# Altium PCB ROS2_0.PcbDoc
Units mil, origin at the board's own origin, x right, y up, seen from the top; angles counter-clockwise.
Board outline 3930 x 2315 mil, 2 copper layers (Top Layer, Bottom Layer); 52 components, 58 nets, 249 pads, 82 vias.
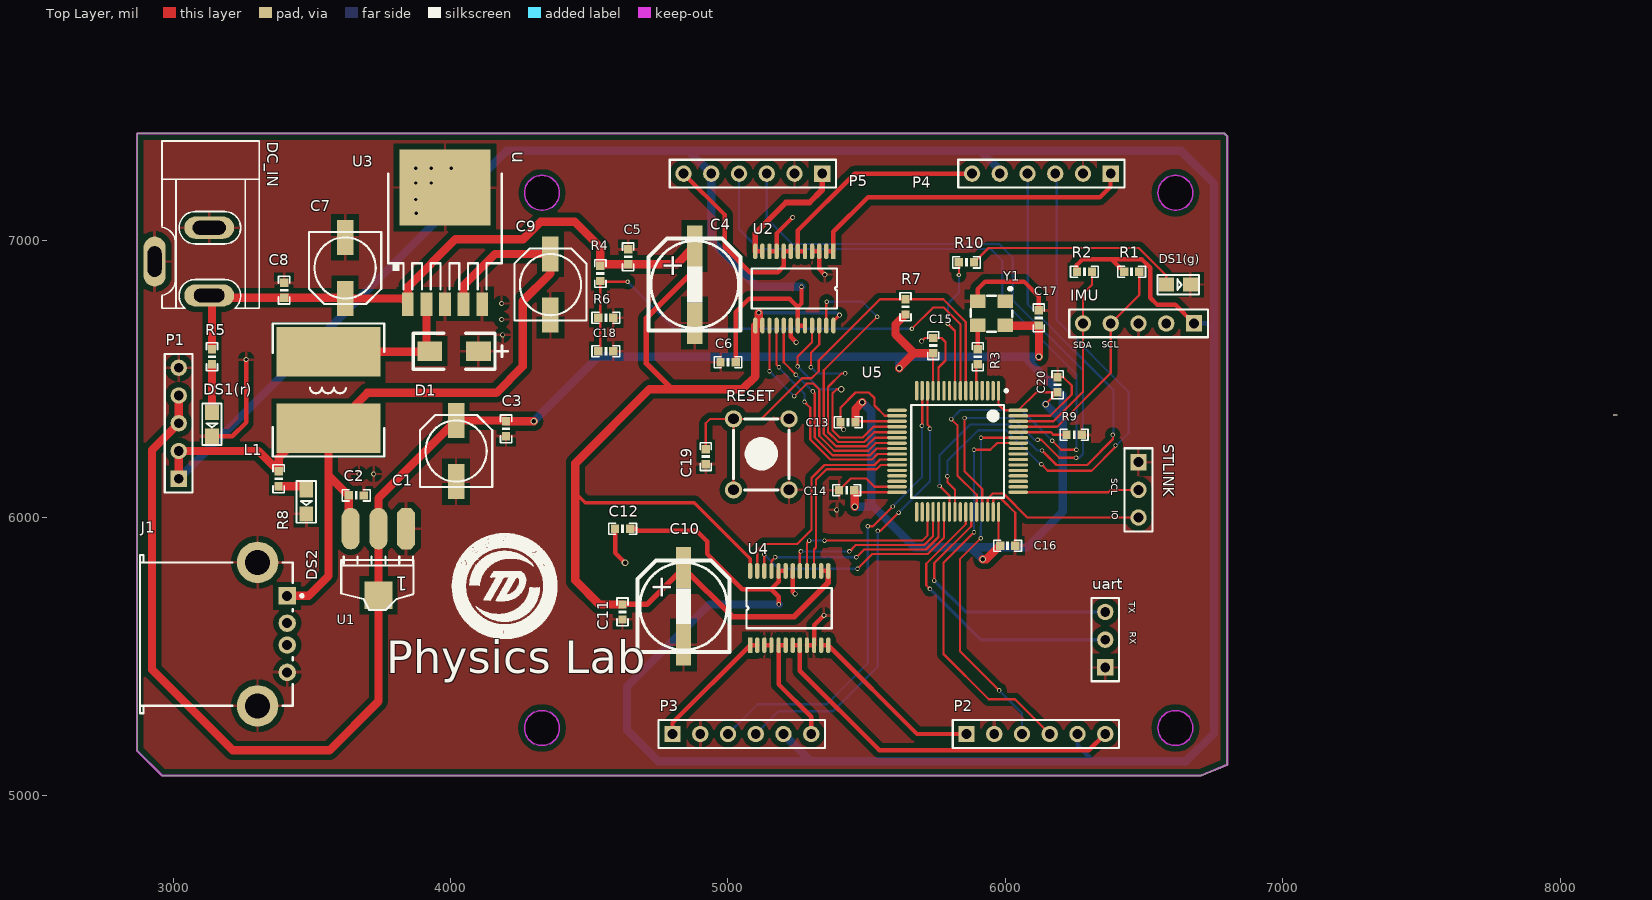
[diagram p0: Top Layer view]
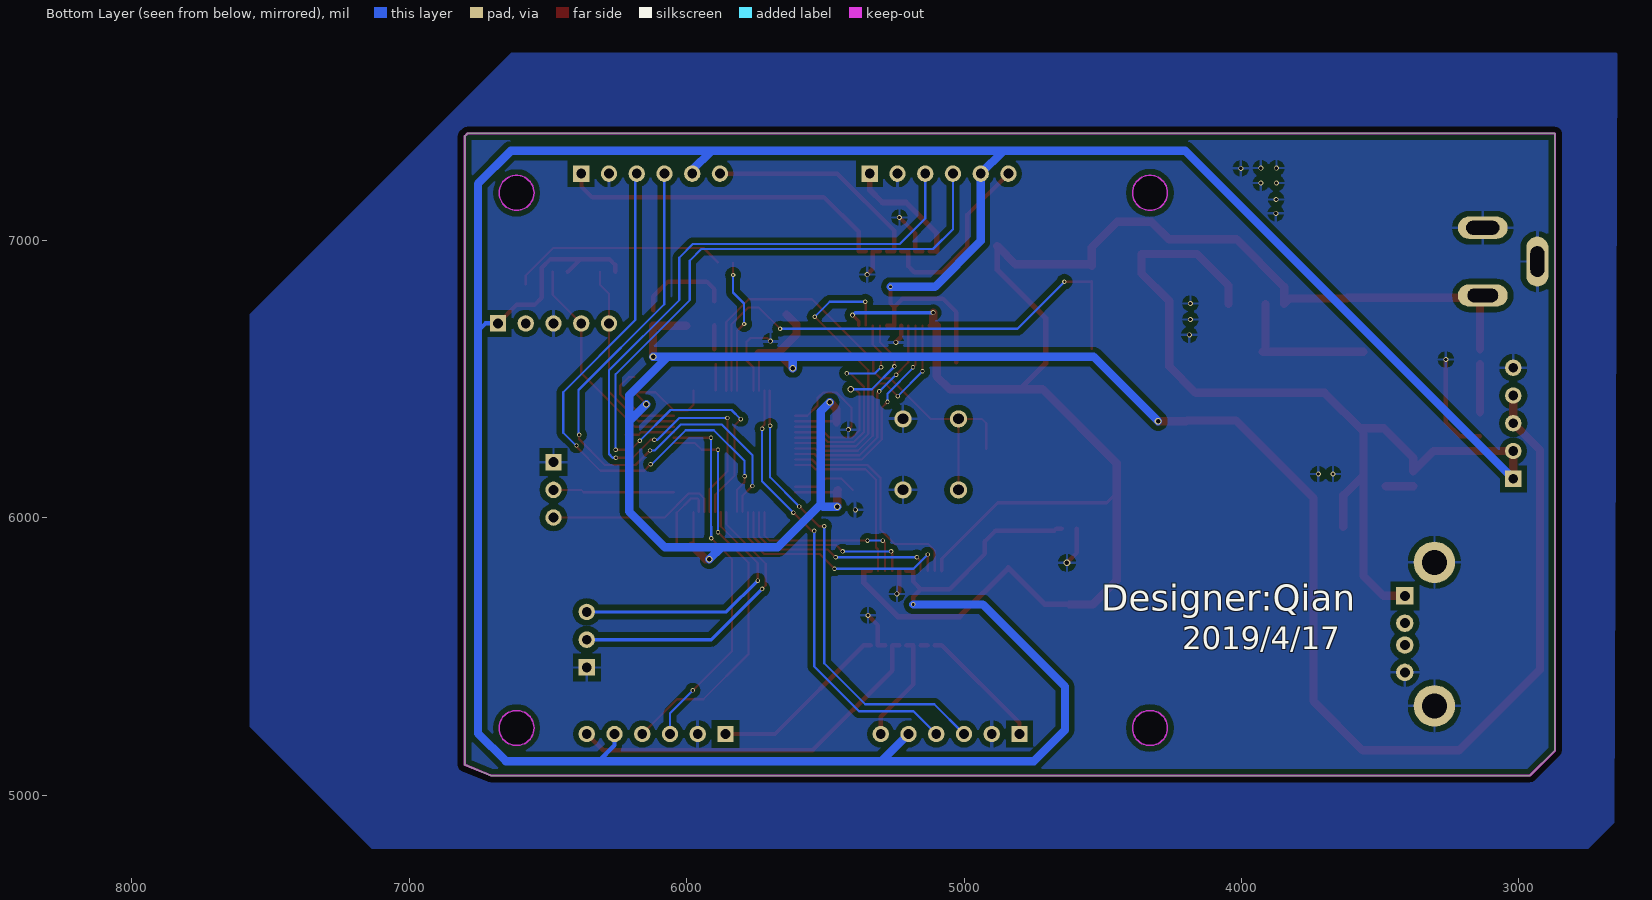
[diagram p1: Bottom Layer view, seen from below]

## Layer stack, top to bottom
Top Layer: signal copper 1.4
Dielectric: dielectric 12.6, FR-4, Dk 4.8
Bottom Layer: signal copper 1.4

## Board outline
2960,5070 2870,5160 2870,7385 6790,7385 6800,7375 6800,5109.14 6705.5,5070
cut-out: 6550.16,5241.58 ccw(c6613.15,5241.58) 6613.15,5178.59 ccw(c6613.15,5241.58) 6676.14,5241.58 ccw(c6613.15,5241.58) 6613.15,5304.57 ccw(c6613.15,5241.58)
cut-out: 6613.15,7107.72 cw(c6613.15,7170.71) 6550.16,7170.71 cw(c6613.15,7170.71) 6613.15,7233.71 cw(c6613.15,7170.71) 6676.14,7170.71 cw(c6613.15,7170.71)
cut-out: 4329.69,7107.72 cw(c4329.69,7170.71) 4266.69,7170.71 cw(c4329.69,7170.71) 4329.69,7233.71 cw(c4329.69,7170.71) 4392.68,7170.71 cw(c4329.69,7170.71)
cut-out: 4329.69,5178.59 cw(c4329.69,5241.58) 4266.69,5241.58 cw(c4329.69,5241.58) 4329.69,5304.57 cw(c4329.69,5241.58) 4392.68,5241.58 cw(c4329.69,5241.58)

## Design rules (kind name [scope] priority, off if disabled: settings)
Clearance 铺铜 [InPolygon] p1: gap=20
Clearance 32 [InComponent(U5) vs InComponent(U5)] p2: gap=0
Clearance [All] p3: gap=8
MinimumSolderMaskSliver [All] p1: minsoldermaskwidth=5
PolygonConnect [All] p1: connectstyle=Relief reliefconductorwidth=10 reliefentries=4 polygonreliefangle="90 Angle"
RoutingVias [All] p1: holewidth=28 width=50 viastyle="Through Hole" minholewidth=8 minwidth=16 maxholewidth=28 maxwidth=50
SilkscreenOverComponentPads [All] p1: minsilkscreentomaskgap=0
SolderMaskExpansion [All] p1: expansion=4
TestPointUsage [All] p1: valid=0 allowmultiple=FALSE
Testpoint [All] p1: side=15 testpointundercomponent=TRUE minsize=40 maxsize=100 preferedsize=60 minholesize=0 maxholesize=40 preferedholesize=32 testpointgrid=1 style=1023 order=0-112345678
Width [All] p1: maxlimit=30 minlimit=8 preferedwidth=10
22 further rules are at their usual default settings.

## Components (designator, comment, footprint, x,y, rotation, side; value= is the part's Value field where it differs from the comment)
C1 "220uF" CC6.56.5 4020,6240 r270 top
C2 "104" 0603P 3660,6080 r180 top
C3 "104" 0603P 4200,6320 r90 top
C4 "680UF" SMD-EC-F8 4880,6840 r270 top
C5 "104" 0603P 4640,6940 r90 top
C6 "104" 0603P 5000,6560 r0 top
C7 "220uF" CC6.56.5 3620,6900 r90 top
C8 "104" 0603P 3400,6820 r270 top
C9 "220uF" CC6.56.5 4360,6840 r270 top
C10 "680UF" SMD-EC-F8 4840,5680 r270 top
C11 "104" 0603P 4620,5660 r270 top
C12 "104" 0603P 4620,5960 r0 top
C13 "104" 0603P 5433,6344 r180 top
C14 "104" 0603P 5428,6099 r180 top
C15 "104" 0603P 5740,6620 r90 top
C16 "104" 0603P 6008,5899 r0 top
C17 "104" 0603P 6120,6720 r270 top
C18 "104" 0603P 4560,6600 r180 top
C19 "104" 0603P 4920,6220 r270 top
C20 "104" 0603P 6188,6479 r90 top
D1 "1N5822" SS54 4100,6600 r180 top
DC_IN "POWER" DC10B 2960,7220 r270 top
DS1(g) "LED1" SMDLED 6580,6840 r0 top
DS1(r) "LED1" SMDLED 3140,6380 r270 top
DS2 "LED1" SMDLED 3480,6100 r270 top
IMU "IMU" HDR1X5 6680,6700 r180 top (schematic designator P6)
J1 "787761-1" 787761 2880,5580 r180 top
L1 "LC" CD104 3560,6460 r270 top
P1 "Header 5" HDR1X5 3020,6140 r90 top
P2 "moter1" HDR1X6 5860,5220 r0 top
P3 "moter2" HDR1X6 4800,5220 r0 top
P4 "moter3" HDR1X6 6380,7240 r180 top
P5 "moter4" HDR1X6 5340,7240 r180 top
R1 "4.7K" 0603P 6455,6886 r0 top
R2 "4.7K" 0603P 6285,6886 r0 top
R3 "22R" 0603P 5900,6580 r90 top
R4 "10K" 0603P 4540,6880 r90 top
R5 "10K" 0603P 3140,6580 r90 top
R6 "1K" 0603P 4560,6720 r180 top
R7 "10K" 0603P 5640,6760 r270 top
R8 "10K" 0603P 3380,6140 r90 top
R9 "10K" 0603P 6248,6299 r180 top
R10 "10K" 0603P 5860,6920 r180 top
RESET "KEY_M" KEY_M 5020,6100 r90 top
STLINK "ST-LINK" HDR1X3 6480,6200 r270 top (schematic designator P7)
U1 "AMS1117-3.3" AMS1117 3840,5960 r180 top
U2 "tb6612" tb6612 5380,6960 r270 top
U3 "LM2596SX-ADJ/NOP" KTT0005B 3980,6980 r270 top
U4 "tb6612" tb6612 5080,5540 r90 top
U5 "STM32F101RCT6" STM-LQFP64_N 5828,6239 r270 top
uart "Header 3" HDR1X3 6360,5460 r90 top
Y1 "5032 8M" 5032 6000,6780 r180 top

## Footprints (in the part's own frame and the unit in brackets; to place one, negate y for a bottom-side part, rotate by r counter-clockwise, add the part's x,y. Pads: shape width x height; smd on the part's side, far side on the other; paste and mask are expansions set on the pad)
0603P [mil]
  rect 30x30 smd: 1(-27,0) 2(27.5,-0.06)
  silkscreen extent -50,-20 50,20
5032 [mm]
  rect 1.4x1.2 smd: 1(0,0) 2(0,2.2) 3(2.54,0) 4(2.54,2.2)
  silkscreen extent -0.64,-1.14 3.17,2.79
787761 [mm] "Connector; USB1.1, Type A, Thru-Hole; 4 Position; Right Angle"
  rect 1.6x1.6 hole 0.92: 1(-13.49,-3.5)
  round 1.6 hole 0.92: 2(-13.49,-1) 3(-13.49,1) 4(-13.49,3.5)
  round 3.8 hole 2.3: 5(-10.78,6.57) 6(-10.78,-6.57)
  silkscreen extent -14.97,-7.25 0,7.25
AMS1117 [mil]
  oct 65x150 smd: 1(0.03,-0.06)
  oval 65x150 smd: 2(100.03,-0.06) 3(200.03,-0.06)
  rect 100x100 smd: 4(100.03,239.94)
  silkscreen extent -26,100 234,293
CC6.56.5 [mm]
  rect 3.2x1.5 smd: 1(-2.794,0) 2(2.8,0)
  silkscreen extent -3.3,-3.3 3.3,3.3
CD104 [mm]
  rect 4.5x9.5 smd: 1(-3.5,0) 2(3.5,0)
  silkscreen extent -6.1,-5.1 6.1,5.1, body extent -4.5,-4.92 4.5,4.92, height 5.3
DC10B [mil]
  oval 80x180 hole 50 slot 110 at 90 deg: 1(419.09,170)
  oval 80x180 hole 50 slot 120 at 90 deg: 2(175,170)
  oval 180x80 hole 50 slot 110 at 0 deg: 3(297.05,-26.85)
  silkscreen extent -138,0 465,350
HDR1X3 [mm] "Connector; Header; 3 Position"
  rect 1.5x1.5 hole 0.9: 1(0,0)
  round 1.5 hole 0.9: 2(2.54,0) 3(5.08,0)
  silkscreen extent -1.27,-1.27 6.35,1.27
HDR1X5 [mm] "Connector; Header; 5 Position"
  rect 1.5x1.5 hole 0.9: 1(0,0)
  round 1.5 hole 0.9: 2(2.54,0) 3(5.08,0) 4(7.62,0) 5(10.16,0)
  silkscreen extent -1.27,-1.27 11.43,1.27
HDR1X6 [mm] "Connector; Header; 6 Position"
  rect 1.5x1.5 hole 0.9: 1(0,0)
  round 1.5 hole 0.9: 2(2.54,0) 3(5.08,0) 4(7.62,0) 5(10.16,0) 6(12.7,0)
  silkscreen extent -1.27,-1.27 13.97,1.27
KEY_M [mil]
  round 62 hole 38: 1(0,0) 1(255.91,0) 2(0,-200) 2(255.91,-200)
  silkscreen extent 0,-200 255,0
KTT0005B [mm]
  rect 2.16x1.07 smd paste-0.102 mask+0.051: 1(5.338,-3.4) 2(5.338,-1.7) 3(5.338,0.005) 4(5.338,1.7) 5(5.338,3.4)
  rect 6.99x8.33 smd paste-0.102 mask+0.051: 6(-5.338,0)
  silkscreen extent -6.6,-5.2 4,5.2, body extent 0,0 0.25,0.25, height 0.25
SMD-EC-F8 [mm]
  rect 3.8x1.4 smd: 1(-3.525,0) 2(3.525,0)
  silkscreen extent -4.21,-4.22 4.19,4.2
SMDLED [mm]
  rect 1.4x1.27 smd: 1(0.001,-0.002) 2(2.211,-0.002)
  silkscreen extent -0.8,-0.89 3.01,0.89
SS54 [mil] "SS54"
  rect 90x70 smd: 1(0,0) 2(175,0)
  silkscreen extent -105,-65 235,65
STM-LQFP64_N [mm] "Thin QFP, 64-Leads, Body 10x10mm, Pitch 0.5mm, IPC Medium Density"
  oval 1.8x0.3 smd: 1(-5.55,3.75) 2(-5.55,3.25) 3(-5.55,2.75) 4(-5.55,2.25) 5(-5.55,1.75) 6(-5.55,1.25) 7(-5.55,0.75) 8(-5.55,0.25) 9(-5.55,-0.25) 10(-5.55,-0.75) 11(-5.55,-1.25) 12(-5.55,-1.75) 13(-5.55,-2.25) 14(-5.55,-2.75) 15(-5.55,-3.25) 16(-5.55,-3.75) 33(5.55,-3.75) 34(5.55,-3.25) 35(5.55,-2.75) 36(5.55,-2.25) 37(5.55,-1.75) 38(5.55,-1.25) 39(5.55,-0.75) 40(5.55,-0.25) 41(5.55,0.25) 42(5.55,0.75) 43(5.55,1.25) 44(5.55,1.75) 45(5.55,2.25) 46(5.55,2.75) 47(5.55,3.25) 48(5.55,3.75)
  oval 0.3x1.8 smd: 17(-3.75,-5.55) 18(-3.25,-5.55) 19(-2.75,-5.55) 20(-2.25,-5.55) 21(-1.75,-5.55) 22(-1.25,-5.55) 23(-0.75,-5.55) 24(-0.25,-5.55) 25(0.25,-5.55) 26(0.75,-5.55) 27(1.25,-5.55) 28(1.75,-5.55) 29(2.25,-5.55) 30(2.75,-5.55) 31(3.25,-5.55) 32(3.75,-5.55) 49(3.75,5.55) 50(3.25,5.55) 51(2.75,5.55) 52(2.25,5.55) 53(1.75,5.55) 54(1.25,5.55) 55(0.75,5.55) 56(0.25,5.55) 57(-0.25,5.55) 58(-0.75,5.55) 59(-1.25,5.55) 60(-1.75,5.55) 61(-2.25,5.55) 62(-2.75,5.55) 63(-3.25,5.55) 64(-3.75,5.55)
  silkscreen extent -5.67,-4.25 4.25,4.58, body extent -5,-5 5,5, height 1.6
tb6612 [mm]
  rect 1.45x0.4 smd: 1(0,0)
  oval 1.45x0.4 smd: 2(0,-0.65) 3(0,-1.3) 4(0,-1.95) 5(0,-2.6) 6(0,-3.25) 7(0,-3.9) 8(0,-4.55) 9(0,-5.2) 10(0,-5.85) 11(0,-6.5) 12(0,-7.15) 13(6.8,-7.15) 14(6.8,-6.5) 15(6.8,-5.85) 16(6.8,-5.2) 17(6.8,-4.55) 18(6.8,-3.9) 19(6.8,-3.25) 20(6.8,-2.6) 21(6.8,-1.95) 22(6.8,-1.3) 23(6.8,-0.65) 24(6.8,0)
  silkscreen extent 1.56,-7.48 5.24,0.33

## Part data
C1 C7 C9: library part CAP
C2 C3 C5 C6 C8 C11 C12 C13 C14 C15 C16 C17 C18 C19 C20: library part C
C4 C10: library part CAP, "贴片铝电解电容 50V 680UF  10*10.2mm"
D1: library part "Diode 1N4007", "1 Amp General Purpose Rectifier"
DC_IN: library part POW
DS1(g) DS1(r) DS2: library part LED2, "Typical RED, GREEN, YELLOW, AMBER GaAs LED"
IMU: library part "Header 5", "Header, 5-Pin"
J1: "USB 1.1, Right Angle, Thru-Hole, A Type, Receptacle, 4 Position, Black"
L1: "电感"
P1: "Header, 5-Pin"
P2 P3 P4 P5: library part "Header 6", "Header, 6-Pin"
R1 R2 R3 R4 R5 R6 R7 R8 R9 R10: library part R
STLINK: library part "Header 3", "Header, 3-Pin"
U1: library part AMS1117
U3: "Imported"
U5: "ARM Cortex-M3 32-bit MCU, 256 KB Flash, 32 KB Internal RAM, 51 I/Os, 64-pin LQFP, -40 to 85 degC, Tray"
uart: "Header, 3-Pin"
Y1: library part 0532

## Via types
v1: diameter 16, hole 10, Top Layer to Bottom Layer, 46 vias
v2: diameter 18, hole 12, Top Layer to Bottom Layer, 23 vias
v3: diameter 24, hole 16, Top Layer to Bottom Layer, 9 vias
v4: diameter 16, hole 8, Top Layer to Bottom Layer, 4 vias

## Nets (pads, with @x,y where several pads share a name; then routed paths per layer and width w, separated by ;. In a path a pad name is that pad's centre, name@x,y a point inside that pad or via, vN(x,y) a via of type N, cw(c..) or ccw(c..) an arc to the next point about the centre after c; other vN are vias at no path point)
5V: C2.2 C6.2 C9.1 C12.2 IMU.1 J1.1 L1.2 P1.1 P1.2 P2.5 P3.5 P4.5 P5.5 R1.1 R2.1 R8.2 U1.3 U2.19 U2.20 U3.4 U4.19 U4.20 | length 15917.7
  Top Layer w16: C12.2 4667.63,5959.94 4675.56,5952 4887,5952 4925,5914 4925,5869 5052,5742 5156,5742 ; C6.2 5027.5,6740.5 5076,6789 5222,6789 5252.05,6758.95 ; v1(5183,5687) 5183,5715 5156,5742 ; U4.19 U4.20 5182.36,5768.36 5156,5742 ; v1(5265,6832) 5265,6771.91 5252.05,6758.95 ; U2.20 U2.19 5252.05,6758.95 ; R2.1 6258,6911 6279,6932 6382,6932 ; R1.1 6382,6932 ; IMU.1 6612,6768 6547,6768 6522,6793 6522,6901 6491,6932 6382,6932
  Top Layer w30: P1.1 P1.2 3307.56,6240 R8.2 3380.06,6215.06 3487.2,6322.2 L1.2 ; J1.1 3487.8,5717.8 3560,5790 3560,6152.56 ; U1.3@3632.5,5967.53 C2.2 3560,6152.56 ; U3.4 4046.93,6836.93 4160,6950 C9.1 4360,6880 4260,6780 4260,6545 4165,6450 3700,6450 3560,6310 3560,6152.56
  Bottom Layer w16: P2.5 6260,5179 6317,5122 ; IMU.1 6725,6700 6752,6673
  Bottom Layer w30: P1.1 4202,7322 4858,7322 ; v1(5183,5687) 4932,5687 4636,5391 4636,5234 4748,5122 5298,5122 ; P3.5 5298,5122 ; v1(5265,6832) 5105,6832 4940,6997 P5.5 4858,7322 ; P4.5 5980,7253 5911,7322 ; 4858,7322 5911,7322 ; 5298,5122 6317,5122 6652,5122 6752,5222 6752,6673 6752,7204 6634,7322 5911,7322
12V: C4.1 C5.1 C7.1 C8.2 C10.1 C11.1 DC_IN.1 R4.2 R5.2 U2.13 U2.14 U2.24 U3.1 U4.13 U4.14 U4.24 | length 6616.5
  Top Layer w12: 4450,6089 4485,6054 4878,6054 5080,5852 U4.24 ; U2.24 5380,6708 v2(5402,6730)
  Top Layer w16: U2.13 U2.14 ; U4.14 U4.13
  Top Layer w20: C11.1 4708.2,5687 C10.1 5015.8,5643 5239,5643 5361.5,5765.5 U4.13 ; 4799,6463 4705,6557 4705,6718 4880,6893 C4.1
  Top Layer w30: DC_IN.1 3140.06,6790.84 R5.2 ; DC_IN.1@3138.41,6792.5 C8.2 C7.1@3617.5,6792.5 ; C7.1 3826,6790 U3.1 3846.14,6832.14 4018,7004 4262,7004 4324,7066 4448,7066 4540.06,6973.94 R4.2 4545.56,6913 C5.1 4814.2,6913 C4.1 ; C11.1 4536,5687 4450,5773 4450,6089 4450,6196 4717,6463 4799,6463 5052,6463 5098.5,6509.5 U2.13 ; 5111,6704.78 v2(5111,6739)
  Bottom Layer w12: v2(5111,6739) 5393,6739 v2(5402,6730)
A8: U5.41
A15: U5.50
AIN1: U2.21 U5.20 | length 789.3
  Top Layer w8: v1(5251,6545) 5251,6580 5303.23,6632.23 U2.21 ; v3(5408,6463) 5392,6463 5377,6448 5377,6315 5403,6289 5485.71,6289 5524.29,6327.58 U5.20
  Bottom Layer w8: v1(5251,6545) 5333,6463 v3(5408,6463)
AIN2: U2.22 U5.21 | length 818.3
  Top Layer w8: v1(5299,6542) 5299,6594 5328.82,6623.82 U2.22 ; v1(5423,6520) 5410,6520 5361,6471 5361,6308.37 5396.37,6273 5492.33,6273 5527.23,6307.9 U5.21
  Bottom Layer w8: v1(5299,6542) 5321,6520 v1(5423,6520)
AO1: P4.1 U2.1 U2.2 | length 1201.1
  Top Layer w16: U2.2 U2.1 5380,7030 5505,7155 6341,7155 6379,7193 P4.1@6379,7232
AO2: P4.6 U2.5 U2.6 | length 813.5
  Top Layer w16: U2.5 U2.6 5252.05,7035.05 5457,7240 P4.6
B3: U5.55
B4: U5.56
B5: U5.57
BIN1: U2.17 U5.24 | length 782.9
  Top Layer w8: U2.17 5200.87,6560.13 v1@5245.5,6515.5 ; v1(5306,6455) 5313,6448 5313,6288.49 5376.49,6225 5512.22,6225 5536.06,6248.84 U5.24
  Bottom Layer w8: v1@5245.5,6515.5 v1(5306,6455)
  other v1: 5245,6515
BIN2: U2.16 U5.25 | length 812.5
  Top Layer w8: U2.16 5175.28,6550.72 v1(5184,6542) ; v1(5276,6417) 5297,6396 5297,6281.86 5369.86,6209 5518.84,6209 5539,6229.16 U5.25
  Bottom Layer w8: v1(5184,6542) 5183.23,6541.23 5183.23,6539.77 5276,6447 v1(5276,6417)
BO1: P5.1 U2.11 U2.12 | length 455.4
  Top Layer w16: U2.12 U2.11
  Top Layer w20: U2.12 5098.5,7025.5 5209,7136 5294,7136 5340,7182 P5.1
BO2: P5.6 U2.7 U2.8 | length 663.6
  Top Layer w16: P5.6 4989,7091 4989,6975 5079,6885 5179,6885 5200.87,6906.87 U2.8 U2.7
BOOT0: R9.2 U5.60 | length 177.7
  Top Layer w8: U5.60 6164.17,6307.9 6173,6299.06 R9.2
BOOT1: U5.28
C10: U5.51
C11: U5.52
C12: U5.53
CIN1: U4.21 U5.37 | length 764.5
  Top Layer w8: U4.21 5156.77,5843.77 v1(5170,5857) ; v1(5463,5857) 5491,5885 5713.99,5885 5759.1,5930.12 U5.37
  Bottom Layer w8: v1(5170,5857) v1(5463,5857)
CIN2: U4.22 U5.38 | length 867.6
  Top Layer w8: v1(5131,5867) 5131.18,5866.82 U4.22 ; v1(5467,5816) 5520,5869 5720.61,5869 5778.79,5927.17 U5.38
  Bottom Layer w8: v1(5131,5867) 5182,5816 v1(5467,5816)
CO1: P3.1 U4.1 U4.2 | length 461.6
  Top Layer w16: P3.1 4800,5260 U4.1 U4.2
CO2: P3.6 U4.5 U4.6 | length 394.3
  Top Layer w16: U4.6 U4.5 5182.36,5399.64 5300,5282 P3.6
DIN1: U4.17 U5.36 | length 658.5
  Top Layer w8: U4.17 5259.13,5874.13 v1(5263,5878) ; v1(5438,5878) 5461,5901 5707.36,5901 5739.42,5933.06 U5.36
  Bottom Layer w8: v1(5263,5878) v1(5438,5878)
DIN2: U4.16 U5.35 | length 631.8
  Top Layer w8: U4.16 5284.72,5908.72 v1(5293,5917) ; v1(5348,5917) 5700.73,5917 5719.73,5936 U5.35
  Bottom Layer w8: v1(5293,5917) v1(5348,5917)
DO1: P2.1 U4.11 U4.12 | length 656.6
  Top Layer w16: U4.11 U4.12 5681.5,5220 P2.1
DO2: P2.6 U4.7 U4.8 | length 1361.9
  Top Layer w16: U4.7 U4.8 5259.13,5447.87 5546,5161 6301,5161 P2.6
GND: C1.2 C2.1 C3.1 C4.2 C5.2 C6.1 C7.2 C8.1 C9.2 C10.2 C11.2 C12.1 C13.2 C14.2 C15.2 C16.2 C17.1 C18.1 C19.2 C20.2 D1.1 DC_IN.2 DC_IN.3 DS1(g).2 DS1(r).2 DS2.2 IMU.3 J1.4 J1.5 J1.6 P1.5 P2.2 P3.2 P4.2 P5.2 R6.1 R9.1 RESET.2 STLINK.1 U1.1 U2.3 U2.4 U2.9 U2.10 U2.18 U3.3 U3.5 U3.6 U4.3 U4.4 U4.9 U4.10 U4.18 U5.12 U5.18 U5.31 U5.47 U5.63 uart.1 Y1.3 | length 2942.6
  Top Layer w8: C14.2 5442.44,6141 5498,6141 5527.95,6111.05 U5.31 ; v2(5417,6317) 5405.5,6328.5 C13.2 5405.5,6396.5 5460,6451 5508,6451 5528,6431 5528,6404 5565.05,6366.95 U5.18 ; v2(5698,6636) 5709.5,6647.5 C15.2 5769.5,6647.5 5784,6633 5784,6566 5759.1,6541.1 U5.12 ; U5.47 5955.95,6063.95 5961,6069 5984,6069 6035.5,6017.5 C16.2 ; U5.63 6161.95,6366.95 6239,6444 6239,6476 6208.5,6506.5 C20.2
  Top Layer w16: 3139.94,6292.96 3212.96,6292.96 3263,6343 v2(3263,6570) ; C12.1 4593,5873 v3(4629,5837) ; U4.3 U4.4 ; U2.10 U2.9 5175.28,7024.28 v2(5233,7082) ; U2.18 5226.46,6651.54 v2(5246,6632) ; U4.18 5233.54,5733.46 v2(5242,5725) ; U4.9 U4.10 5310.32,5612.32 v2(5346,5648) ; U2.4 U2.3 5328.82,6896.18 v2(5349,6876) ; Y1.3 5900,6824 5927,6851 6067,6851 6120,6798 C17.1
  other v2: 5392,6028 3670,6157 3723,6157 4188,6659 4184,6714 4184,6772 3876,7097 3875,7147 3874,7206 3930,7206 4002,7259 3874,7260 3930,7260
LED: R10.2 U5.9 | length 489.3
  Top Layer w8: v4(5793,6698) 5818.16,6672.84 U5.9 ; v4(5832.5,6874.5) R10.2
  Bottom Layer w8: v4(5793,6698) 5793,6772 5832.5,6811.5 v4(5832.5,6874.5)
MA1: P2.4 U5.58 | length 1454.1
  Top Layer w8: v1(5887,5947) 5777,5837 5777,5508 5940,5345 6035,5345 P2.4 ; v1(5887,6245) 5946,6245 5969.53,6268.53 U5.58
  Bottom Layer w8: v1(5887,5947) v1(5887,6245)
MA2: P3.4 U5.14 | length 1621.7
  Top Layer w8: v1(5540,5952) 5549,5952 v1(5615,6018) ; U5.14 5719.73,6334.27 5728,6326 v1(5728,6320)
  Bottom Layer w8: P3.4 5182,5302 5379,5302 5540,5463 v1(5540,5952) ; v1(5615,6018) 5728,6131 v1(5728,6320)
MA3: P4.4 U5.39 | length 2068.7
  Top Layer w8: v1(5763,6114) 5798.47,6078.53 U5.39 ; v1(6132,6242) 6184,6190 6295,6190 6388,6283 v1@6388,6291
  Bottom Layer w8: v1(5763,6114) 5763,6226 5873,6336 6021,6336 6115,6242 v1(6132,6242) ; P4.4@6081,7241 6081,6769 6390,6460 v1@6390,6298
  other v1: 6387,6298
MA4: P5.4 U5.44 | length 2884.3
  Top Layer w8: v1(5805,6355) 5827,6333 5827,6152 5896.9,6082.1 U5.44 ; v1(6169,6277) 6201,6245 v1(6256,6245)
  Bottom Layer w8: P5.4 5040,7040 5112,6968 5947,6968 5989,6926 5989,6784 6256,6517 v1(6256,6245) ; v1(5805,6355) 5838,6388 6058,6388 v1(6169,6277)
MB1: P2.3 U5.59 | length 1328.4
  Top Layer w8: v1(5911.43,5925.43) 5836,5850 5836,5519 v1(5978,5377) ; v1(5912.21,6288.21) U5.59
  Bottom Layer w8: v1(5911.43,5925.43) 5911.43,5968 5912.21,5967.21 v1(5912.21,6288.21) ; v1(5978,5377) 6060,5295 P2.3
MB2: P3.3 U5.15 | length 1684.5
  Top Layer w8: v1(5504,5969) 5523,5969 v1(5594,6040) ; v1(5699,6331) 5700.05,6332.05 U5.15
  Bottom Layer w8: P3.3 5107,5327 5356,5327 5504,5475 v1(5504,5969) ; v1(5594,6040) 5699,6145 v1(5699,6331)
MB3: P4.3 U5.40 | length 2034.7
  Top Layer w8: v1(5791,6149) 5791,6128 5818.16,6100.84 U5.40 ; v1(6130,6192) 6153,6169 6311,6169 v1@6397,6255
  Bottom Layer w8: v1(5791,6149) 5791,6204 5902,6315 6003,6315 6126,6192 v1(6130,6192) ; P4.3@6176,7220 6185,7211 6185,6712 6445,6452 6445,6306 v1@6398,6259
  other v1: 6397,6260
MB4: P5.3 U5.45 | length 2776.7
  Top Layer w8: v1(5853,6359) 5853,6167 5916.58,6103.42 U5.45 ; v1(6116,6281) 6129,6281 6194,6216 v1(6255,6216)
  Bottom Layer w8: P5.3 5140,7078 5232,6986 5978,6986 6027,6937 6027,6784 6280,6531 6280,6229 6267,6216 v1(6255,6216) ; v1(5853,6359) 6027,6359 6105,6281 v1(6116,6281)
NetC19_1: C19.1 R7.1 RESET.1 U5.7 | length 1775.6
  Top Layer w8: C19.1 4920,6340 4935.91,6355.91 RESET.1@5020,6355.91 ; RESET.1@5020,6100 RESET.1@5020,6355.91 ; U5.7 5857.53,6705.47 5776,6787 R7.1 5548,6787 5327,6566 5327,6528 5301,6502 5267,6502 5120.91,6355.91 RESET.1@5020,6355.91
NetD1_2: D1.2 L1.1 U3.2 | length 520.7
  Top Layer w30: L1.1 D1.2@3922.8,6597.8 ; D1.2@3913.07,6611.93 U3.2
NetDS1(g)_1: DS1(g).1 R10.1 | length 788.6
  Top Layer w8: R10.1 5939,6972 6481,6972 6580.03,6872.97 6580.03,6839.94
NetDS1(r)_1: DS1(r).1 R5.1 | length 173
  Top Layer w30: 3140,6380.03 R5.1
NetDS2_1: DS2.1 R8.1 | length 99.9
  Top Layer w30: R8.1 DS2.1@3479.94,6113
NetDS2_2: 
NetR3_1: R3.1 U5.5 | length 94
  Top Layer w8: U5.5@5895.39,6459.02 R3.1@5895.39,6553
NetR3_2: R3.2 Y1.4 | length 85.9
  Top Layer w16: R3.2@5900,6607.5 Y1.4
PWMA: U2.23 U5.22 | length 1088.9
  Top Layer w8: U2.23 5354.41,6776.41 v1(5356,6778) ; v1(5538,6724) 5345,6531 5345,6301.75 5389.75,6257 5498.96,6257 5530.17,6288.21 U5.22
  Bottom Layer w8: v1(5356,6778) 5484,6778 v1(5538,6724)
PWMB: U2.15 U5.23 | length 889.8
  Top Layer w8: v1(5149.68,6527.32) U2.15 ; v1(5239,6438) 5284,6483 5308,6483 5329,6462 5329,6295.12 5383.12,6241 5505.59,6241 5533.12,6268.53 U5.23
  Bottom Layer w8: v1(5149.68,6527.32) v1(5239,6438)
PWMC: U4.23 U5.26 | length 822.9
  Top Layer w8: U4.23 5105.59,5881.59 5129,5905 5250,5905 5301,5956 5301,6142.63 5348.37,6190 5528.59,6190 5548.06,6209.47 U5.26
PWMD: U4.15 U5.27 | length 645.8
  Top Layer w8: U4.15 5310.32,5885.32 5317,5892 5317,6136 5355,6174 5535.21,6174 5551,6189.79 U5.27
RX: U5.42 uart.2 | length 1049.7
  Top Layer w8: v1(5728,5743) 5715,5756 5715,5834 5857.53,5976.53 U5.42
  Bottom Layer w12: v1(5728,5743) 5911,5560 uart.2
SCL: IMU.4 R1.2 U5.61 | length 821
  Top Layer w8: U5.61 6186.58,6327.58 6380,6521 IMU.4 6482.5,6802.5 R1.2
SDA: IMU.5 R2.2 U5.62 | length 723.1
  Top Layer w8: U5.62 6173.27,6347.27 6280,6454 IMU.5 6280,6807 6312.5,6839.5 R2.2
SWDCLK: STLINK.2 U5.49 | length 437.1
  Top Layer w8: U5.49 6371.36,6091.36 6380,6100 STLINK.2
SWDIO: STLINK.3 U5.46 | length 635.3
  Top Layer w8: U5.46 5936.27,6068.27 5955,6087 5993,6087 6080,6000 STLINK.3
TX: U5.43 uart.3 | length 965.5
  Top Layer w8: v1(5744,5773) 5744,5836 5877.21,5969.21 U5.43
  Bottom Layer w12: v1(5744,5773) 5857,5660 uart.3
VADOUT: C18.2 R4.1 R6.2 U5.8 | length 1906.8
  Top Layer w8: C18.2@4540,6607.56 R4.1 ; R4.1@4543,6850 v4(4638,6850) ; v4(5663,6681) 5739,6757 5779,6757 5837.84,6698.16 U5.8
  Bottom Layer w8: v4(4638,6850) 4807,6681 v4(5663,6681)
VDD3.3: C1.1 C3.2 C13.1 C14.1 C15.1 C16.1 C17.2 C20.1 P1.3 P1.4 R7.2 U1.2 U1.4 U5.1 U5.13 U5.19 U5.32 U5.48 U5.64 Y1.2 | length 9093.1
  Top Layer w8: C14.1@5462.64,6091.36 U5.32 ; C13.1@5463.27,6347.27 U5.19 ; U5.13 C15.1@5739.42,6593 ; C16.1@5975.64,5904.36 U5.48 ; U5.1 5975.64,6406.36 5995.36,6386.64 U5.64 6111.87,6452 C20.1 v3(6145,6409)
  Top Layer w30: P1.4 P1.3 2924,6244 2924,5452 3215,5161 3563,5161 3739.97,5337.97 U1.4 U1.2 3739.97,6069.97 C1.1 C3.2@4197.56,6350 ; C3.2 v3(4300.5,6347.5) ; C14.1 5457,6097 v3(5457,6039) ; C13.1 5460,6392 v3(5484,6416) ; v3(5617,6539) 5671,6593 ; R7.2 5604,6696.56 5604,6660 5671,6593 ; C15.1 5739.42,6593 5671,6593 ; v3(5918,5850) 5932,5850 C16.1 ; Y1.2@6001.95,6691.44 6121,6691.44 v3(6121,6580)
  Bottom Layer w30: v3(4300.5,6347.5) 4533,6580 6068,6580 ; v3(5457,6039) 5508,6039 ; v3(5484,6416) 5517,6383 5517,6048 5672,5893 5875,5893 ; v3(5617,6539) 5617,6579 ; v3(5918,5850) 5875,5893 ; v3(6121,6580) 6068,6580 ; v3(6145,6409) 6207,6347 ; 5875,5893 6078,5893 6207,6022 6207,6347 ; 6068,6580 6207,6441 6207,6347
pads on no net: IMU.2 J1.2 J1.3 U5.2 U5.3 U5.4 U5.6 U5.10 U5.11 U5.16 U5.17 U5.29 U5.30 U5.33 U5.34 U5.54 Y1.1

## Polygon pours and split planes (outlines as drawn)
GND on Top Layer "Bottom Layer-VCC" (solid, remove dead copper, pour order 1000): 2833,7559 2766,7492 2766,4833 6805,4833 7280,5308 7297,5325 7297,7559
GND on Bottom Layer "Bottom Layer-VCC" (solid, pour order 1001): 2645,7676 6632,7676 7575,6733 7575,5246 7135,4806 2750,4806 2656,4900

## Keep-outs
Keep-Out Layer:
  circle w5: c4329.69,5241.58 r62.99
  circle w5: c6613.15,5241.58 r62.99
  circle w5: c6613.15,7170.71 r62.99
  circle w5: c4329.69,7170.71 r62.99
  lines w8: 2870,5160 2870,7385 6790,7385 6800,7375 6800,5109.14 6705.5,5070 2960,5070 2870,5160

## Other copper
Top Layer:
  pour cut-out: 6043,6828 6061.61,6828 6104.94,6784.68 6104.94,6715 6055,6715 6044,6726
  pour cut-out: 5280.29,7023.35 5468.7,7211.76 5965.76,7211.76 5988,7234 5991,7231 6318,7231 6318,7178 6321,7175 6315,7169 5491,7169 5491,7147.68 5323.82,6980.5 5323.82,6960.97 5278.6,6960.97 5277.64,6960
  pour cut-out: 6273,6269 6342,6269 6352,6259 6308,6215 6274,6215
  pour cut-out: 6034,6075 6090,6019 6526,6019 6530,6023 6530,6088 6514,6104 6495,6085 6329,6085
  pour cut-out: 6099.15,6183.85 6321.15,6183.85 6430.47,6249.53 6434,6167 6475,6150.47 6436.74,6124.98 6366.85,6104.85 6104.15,6104.85 6101.15,6107.85
  pour cut-out: 4485.3,6027.78 4867.14,6027.78 5055,5839.91 5055,5726 4708,5726 4687,5705 4681,5711 4531,5711 4531,5741.92 4485.3,5787.62

## Silkscreen, mask and mechanical layers (free items; w line width, h text height)
Top Overlay:
  drawing of 2402 lines, arcs and shapes, not listed
  text "SCL" at 6347,6603 h40
  text "SDA" at 6244,6602 h40
  text "SCL" at 6373,6142 h40 r270
  text "IO" at 6374,6026 h40 r270
  text "TX" at 6436,5696 h40 r270
  text "RX" at 6439,5589 h40 r270
  text "Physics Lab" at 3769,5399 h200
Bottom Overlay:
  text "Designer:Qian" at 4506,5634 h160
  text "2019/4/17" at 4214,5498 h140

## Text inside footprints (layer, text, board x,y; h text height)
C4: Top Overlay "+" at 4769.07,6953.58 h78.74 r270
C10: Top Overlay "+" at 4729.07,5793.58 h78.74 r270
U1: Top Overlay "1" at 3845.97,5787.06 h50 r180
U3: Top Overlay "u" at 4223,7320 h50 r270